# Altium PCB Sender.PcbDoc
Units mm, origin at the board's own origin, x right, y up, seen from the top; angles counter-clockwise.
Board outline 89 x 77 mm, 2 copper layers (Top Layer, Bottom Layer); 11 components, 8 nets, 62 pads, 0 vias.
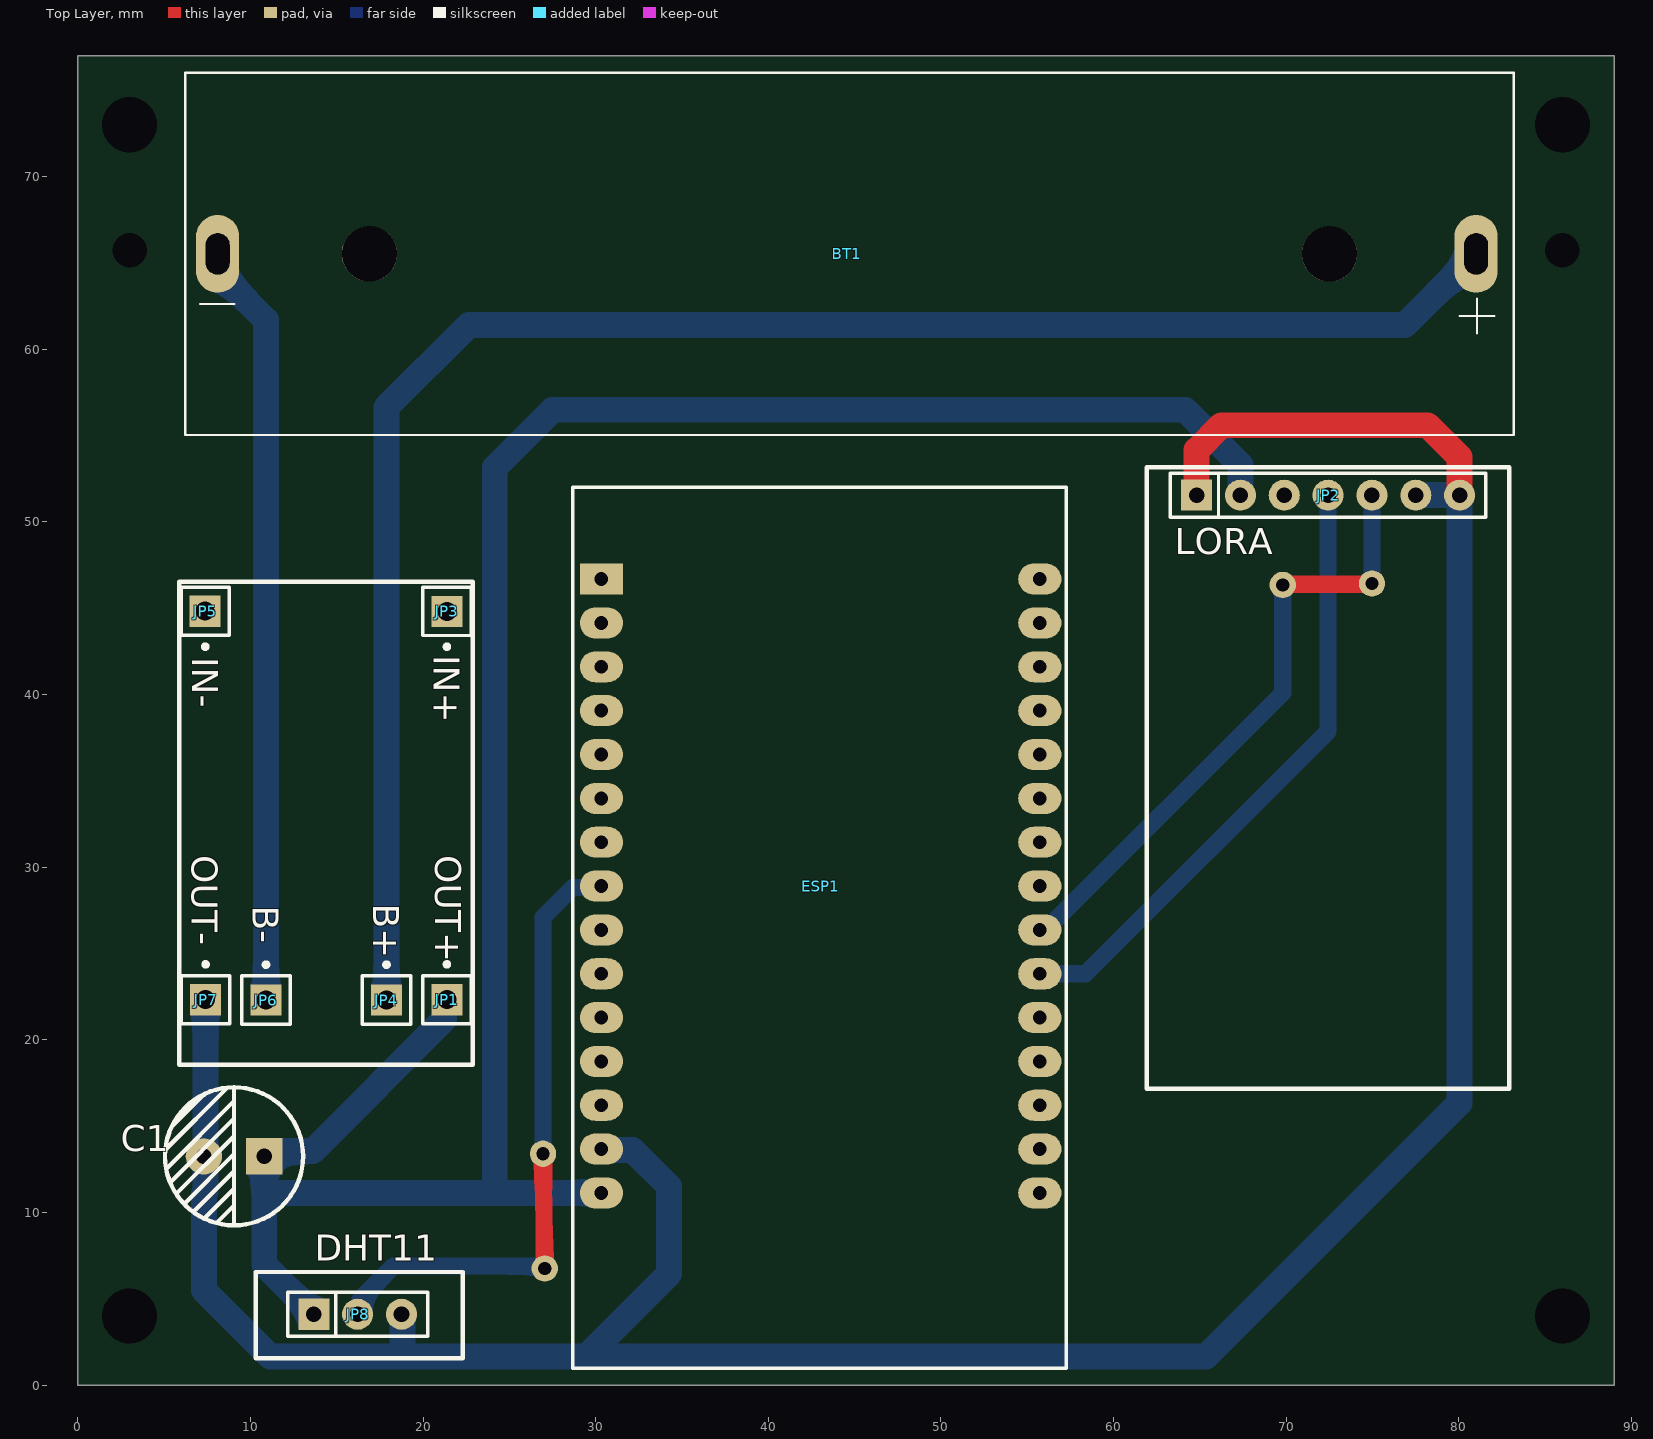
[diagram p0: Top Layer view]
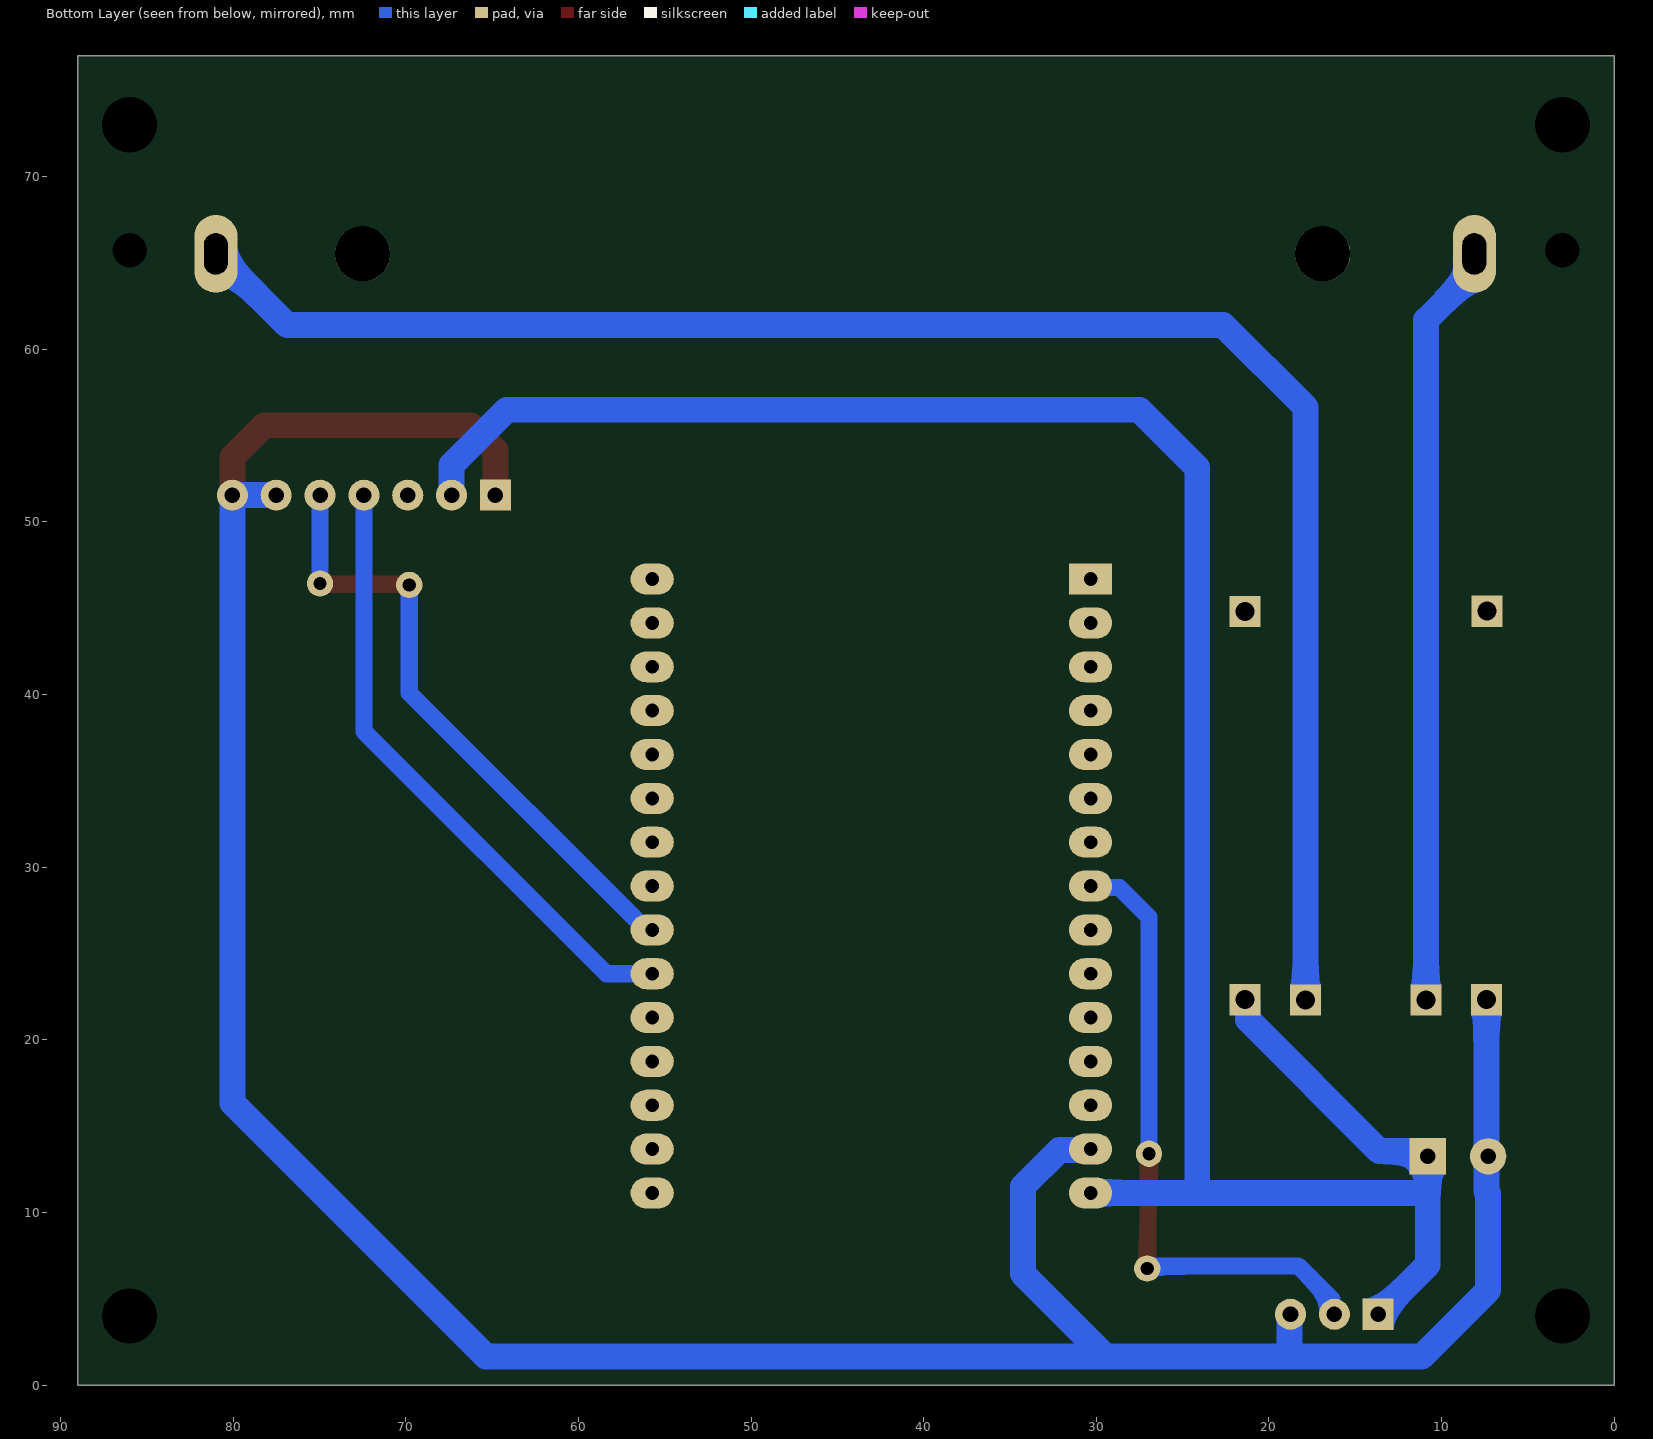
[diagram p1: Bottom Layer view, seen from below]
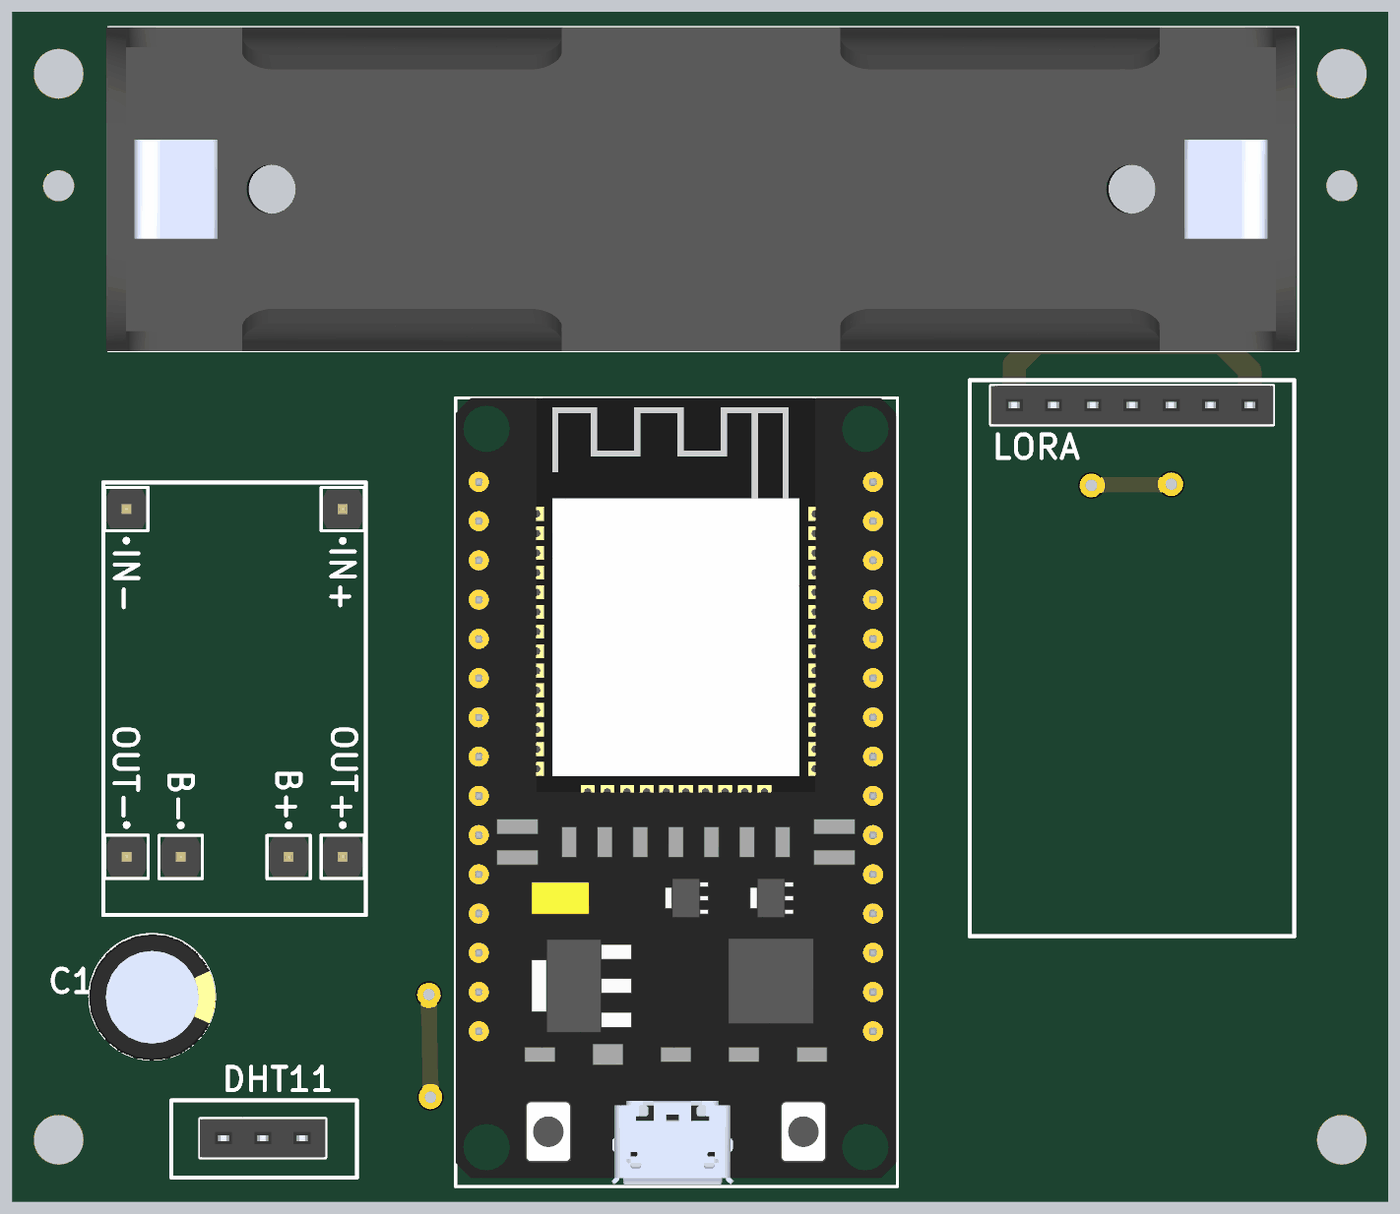
[diagram p2: 3D render of the assembled board from above, using the file's embedded part models]

## Layer stack, top to bottom
Top Solder: solder mask 0.0102, Solder Resist, Dk 3.5
Top Layer: signal copper 0.0356
Dielectric 1: dielectric 0.32, FR-4, Dk 4.8
Bottom Layer: signal copper 0.0356
Bottom Solder: solder mask 0.0102, Solder Resist, Dk 3.5

## Board outline
0,0 89,0 89,77 0,77

## Design rules (kind name [scope] priority, off if disabled: settings)
Clearance [All] p1: gap=0.254 ignorepadtopadclearanceinfootprint=FALSE
PolygonConnect [All] p1: connectstyle=Relief reliefconductorwidth=0.254 reliefentries=4 polygonreliefangle="90 Angle" airgapwidth=0.254
RoutingVias [All] p1: holewidth=0.711 width=1.27 viastyle="Through Hole" minholewidth=0.711 minwidth=1.27 maxholewidth=0.711 maxwidth=1.27
SolderMaskExpansion [All] p1: expansion=0.102 istentingtop=FALSE
Width [All] p1: maxlimit=1.5 minlimit=1 preferedwidth=1.5
30 further rules are at their usual default settings.

## Components (designator, comment, footprint, x,y, rotation, side; value= is the part's Value field where it differs from the comment)
BT1 "18650" "De Pin18650" 44.55,65.53 r180 top
C1 "220uF" "Tu hoa 8mm" 9.05,13.25 r180 top
ESP1 "ESP32 DEVKIT" "ESP32 WROOM 32 KIT" 30.327,46.686 r0 top
JP1 "OUT+" "JP 1x1 DT" 21.38,22.32 r0 top
JP2 "LORA" "JP 1x7 CT" 64.808,51.548 r0 top
JP3 "IN+" "JP 1x1 DT" 21.38,44.82 r180 top
JP4 "B+" "JP 1x1 DT" 17.88,22.3 r0 top
JP5 "IN-" "JP 1x1 DT" 7.38,44.826 r180 top
JP6 "B-" "JP 1x1 DT" 10.9,22.3 r0 top
JP7 "OUT-" "JP 1x1 DT" 7.4,22.32 r0 top
JP8 "DHT11" "JP 1x3 CT" 13.67,4.1 r0 top

## Footprints (in the part's own frame and the unit in brackets; to place one, negate y for a bottom-side part, rotate by r counter-clockwise, add the part's x,y. Pads: shape width x height; smd on the part's side, far side on the other; paste and mask are expansions set on the pad)
"De Pin18650" [mm]
  oval 2.5x4.5 hole 1.38 slot 2.4 at 90 deg: 1(-36.45,0) 2(36.45,0)
  round 3.2 hole 3.2 unplated: ""(-27.955,0) ""(27.66,0)
  silkscreen extent -38.63,-10.49 38.33,10.49, body extent -38.48,-10.49 38.48,10.49, height 21.46
"ESP32 WROOM 32 KIT" [mm]
  rect 2.5x1.8 hole 0.8: 1(0,0)
  oval 2.5x1.8 hole 0.8: 2(0,-2.54) 3(0,-5.08) 4(0,-7.62) 5(0,-10.16) 6(0,-12.7) 7(0,-15.24) 8(0,-17.78) 9(0,-20.32) 10(0,-22.86) 11(0,-25.4) 12(0,-27.94) 13(0,-30.48) 14(0,-33.02) 15(0,-35.56) 16(25.4,-35.56) 17(25.4,-33.02) 18(25.4,-30.48) 19(25.4,-27.94) 20(25.4,-25.4) 21(25.4,-22.86) 22(25.4,-20.32) 23(25.4,-17.78) 24(25.4,-15.24) 25(25.4,-12.7) 26(25.4,-10.16) 27(25.4,-7.62) 28(25.4,-5.08) 29(25.4,-2.54) 30(25.4,0)
  silkscreen extent -1.65,-45.72 26.92,5.33, body extent -1.65,-45.6 26.85,5.33, height 10.49
"JP 1x1 DT" [mm] "1pins, 1 row, straight, gold plating"
  rect 1.8x1.8 hole 1.1: 1(0,0)
  silkscreen extent -1.4,-1.4 1.4,2.17, body extent -1.27,-1.27 1.27,1.27, height 8.54
"JP 1x3 CT" [mm]
  rect 1.8x1.8 hole 0.9: 1(0,0)
  round 1.8 hole 0.9: 2(2.54,0) 3(5.08,0)
  silkscreen extent -1.52,-1.27 6.6,1.27, body extent -1.52,-1.25 6.6,1.25, height 8.51
"JP 1x7 CT" [mm] "7 row, straight, gold plating"
  rect 1.8x1.8 hole 0.9: 1(0,0)
  round 1.8 hole 0.9: 2(2.54,0) 3(5.08,0) 4(7.62,0) 5(10.16,0) 6(12.7,0) 7(15.24,0)
  silkscreen extent -1.52,-1.27 16.76,1.27, body extent -1.52,-1.25 16.76,1.25, height 8.51
"Tu hoa 8mm" [mm]
  rect 2.1x2.1 hole 0.9: 1(-1.75,0)
  round 2.1 hole 0.9: 2(1.75,0)
  silkscreen extent -4,-4 4,4, body extent -4.1,-4.07 4.1,4.13, height 13.81

## Part data
BT1: library part "De Pin18650"
C1: library part "Tu Hoa 220uF 25V 8x10", "Cắm", Chung_Loai=Cắm, Don_Vi=Con, Ma_Hang=MH006864, So_Chan=2, Ten_Linh_Kien="Tụ Hóa 220uF 25V 8x10MM"
ESP1: library part "ESP32 WROOM 32 KIT"
JP1 JP3 JP4 JP5 JP6 JP7: library part "JP 1x1 2.54 Duc Thang", "Cắm", Chung_Loai=Cắm, Don_Vi=Con, Ma_Hang=MH000903, Ten_Linh_Kien="Jump Đơn Đực 2.54MM 1x40P Thẳng 11MM"
JP2: library part "JP 1x7 2.54 Cai Thang", "Cắm", Chung_Loai=Cắm, Don_Vi=Con, Ma_Hang=MH004006, Ten_Linh_Kien="Jump Đơn Cái 2.54MM 1x20P Thẳng"
JP8: library part "JP 1x3 2.54 Cai Thang", "Cắm", Chung_Loai=Cắm, Don_Vi=Con, Ma_Hang=MH004006, Ten_Linh_Kien="Jump Đơn Cái 2.54MM 1x20P Thẳng"

## Free pads (board coordinates)
  round 0 hole 3.2: 7(3,4) 7(3,73) 7(86,4) 7(86,73)
  round 1.524 hole 0.762: 11(27.05,6.75) 12(26.95,13.4) 15(69.8,46.35) 16(74.968,46.432)
  round 1.524 hole 2: 13(86,65.75) 14(3,65.75)

## Nets (pads, with @x,y where several pads share a name; then routed paths per layer and width w, separated by ;. In a path a pad name is that pad's centre, name@x,y a point inside that pad or via, vN(x,y) a via of type N, cw(c..) or ccw(c..) an arc to the next point about the centre after c; other vN are vias at no path point)
AUX: JP2.3
DHT11: ESP1.8 JP8.2 pad.11 pad.12 | length 37
  Top Layer w1: pad.12 pad.11
  Bottom Layer w1: JP8.2 16.363,4.253 16.363,4.963 18.3,6.9 26.758,6.9 26.908,6.75 pad.11 ; pad.12 26.95,27.1 28.669,28.819 30.24,28.819 ESP1.8
GND: C1.2 ESP1.14 JP2.1 JP2.6 JP2.7 JP7.1 JP8.3 | length 175.6
  Top Layer w1.5: JP2.1 64.808,54.158 66.25,55.6 78.2,55.6 80.048,53.752 JP2.7
  Bottom Layer w1.5: JP7.1 7.4,11.2 7.3,11.1 7.3,5.5 11.15,1.65 18.95,1.65 ; JP8.3 18.807,4.043 18.807,1.793 18.95,1.65 ; ESP1.14 30.384,13.609 32.141,13.609 34.25,11.5 34.25,6.45 29.45,1.65 ; JP2.6 JP2.7 80.048,16.348 65.35,1.65 29.45,1.65 ; 18.95,1.65 29.45,1.65
NetBT1_1: BT1.1 JP4.1 | length 101.3
  Bottom Layer w1.5: JP4.1@17.88,22.35 17.88,56.63 22.65,61.4 76.87,61.4 BT1.1@80.296,64.826 ; BT1.1@80.737,64.386 81,64.649 BT1.1
NetBT1_2: BT1.2 JP6.1 | length 44.5
  Bottom Layer w1.5: BT1.2 8.1,64.495 10.9,61.695 JP6.1 ; JP6.1@10.9,22.25 JP6.1 ; JP6.1@10.95,22.25 JP6.1
RXD: ESP1.22 JP2.5 pad.15 pad.16 | length 36.3
  Top Layer w1: pad.15 69.841,46.391 74.927,46.391 pad.16
  Bottom Layer w1: ESP1.22 56.077,26.366 69.8,40.089 pad.15 ; pad.16 JP2.5
TXD: ESP1.21 JP2.4 | length 36.2
  Bottom Layer w1: ESP1.21 58.376,23.826 72.428,37.878 JP2.4
VCC: C1.1 ESP1.15 JP1.1 JP2.2 JP8.1 | length 134.4
  Bottom Layer w1.5: JP8.1@13.75,4.18 JP8.1 10.8,6.97 10.8,11 ; JP1.1 21.23,22.17 21.23,21.18 13.6,13.55 11.1,13.55 C1.1 10.8,11 ; 24.15,11.35 24.15,53.15 27.5,56.5 64.15,56.5 67.344,53.306 67.344,51.552 JP2.2 ; ESP1.15 10.926,11.126 10.8,11
pads on no net: BT1. ESP1.1 ESP1.2 ESP1.3 ESP1.4 ESP1.5 ESP1.6 ESP1.7 ESP1.9 ESP1.10 ESP1.11 ESP1.12 ESP1.13 ESP1.16 ESP1.17 ESP1.18 ESP1.19 ESP1.20 ESP1.23 ESP1.24 ESP1.25 ESP1.26 ESP1.27 ESP1.28 ESP1.29 ESP1.30 JP3.1 JP5.1

## Silkscreen, mask and mechanical layers (free items; w line width, h text height)
Top Overlay:
  lines w0.254: 5.879,18.543 22.879,18.543 22.879,46.543 5.879,46.543 5.879,18.543 ; 10.3,1.55 10.3,6.55 22.3,6.55 22.3,1.55 10.3,1.55 ; 61.928,17.168 61.928,53.168 82.928,53.168 82.928,17.168 61.928,17.168